# Altium PCB FIT_PM_Dual_Range_AFE.PcbDoc (part 16 of 17)
Units mm, origin at the board's own origin, x right, y up, seen from the top; angles counter-clockwise.
Board outline 259 x 114 mm, 8 copper layers (Top Layer, Mid-Layer 1, Mid-Layer 2, Layer 1, Layer 2, Mid-Layer 3, Mid-Layer 4, Bottom Layer), stack 1.616 mm thick; 963 components, 806 nets, 4757 pads, 2208 vias.
Unrouted connection lines stored in the file: 682.
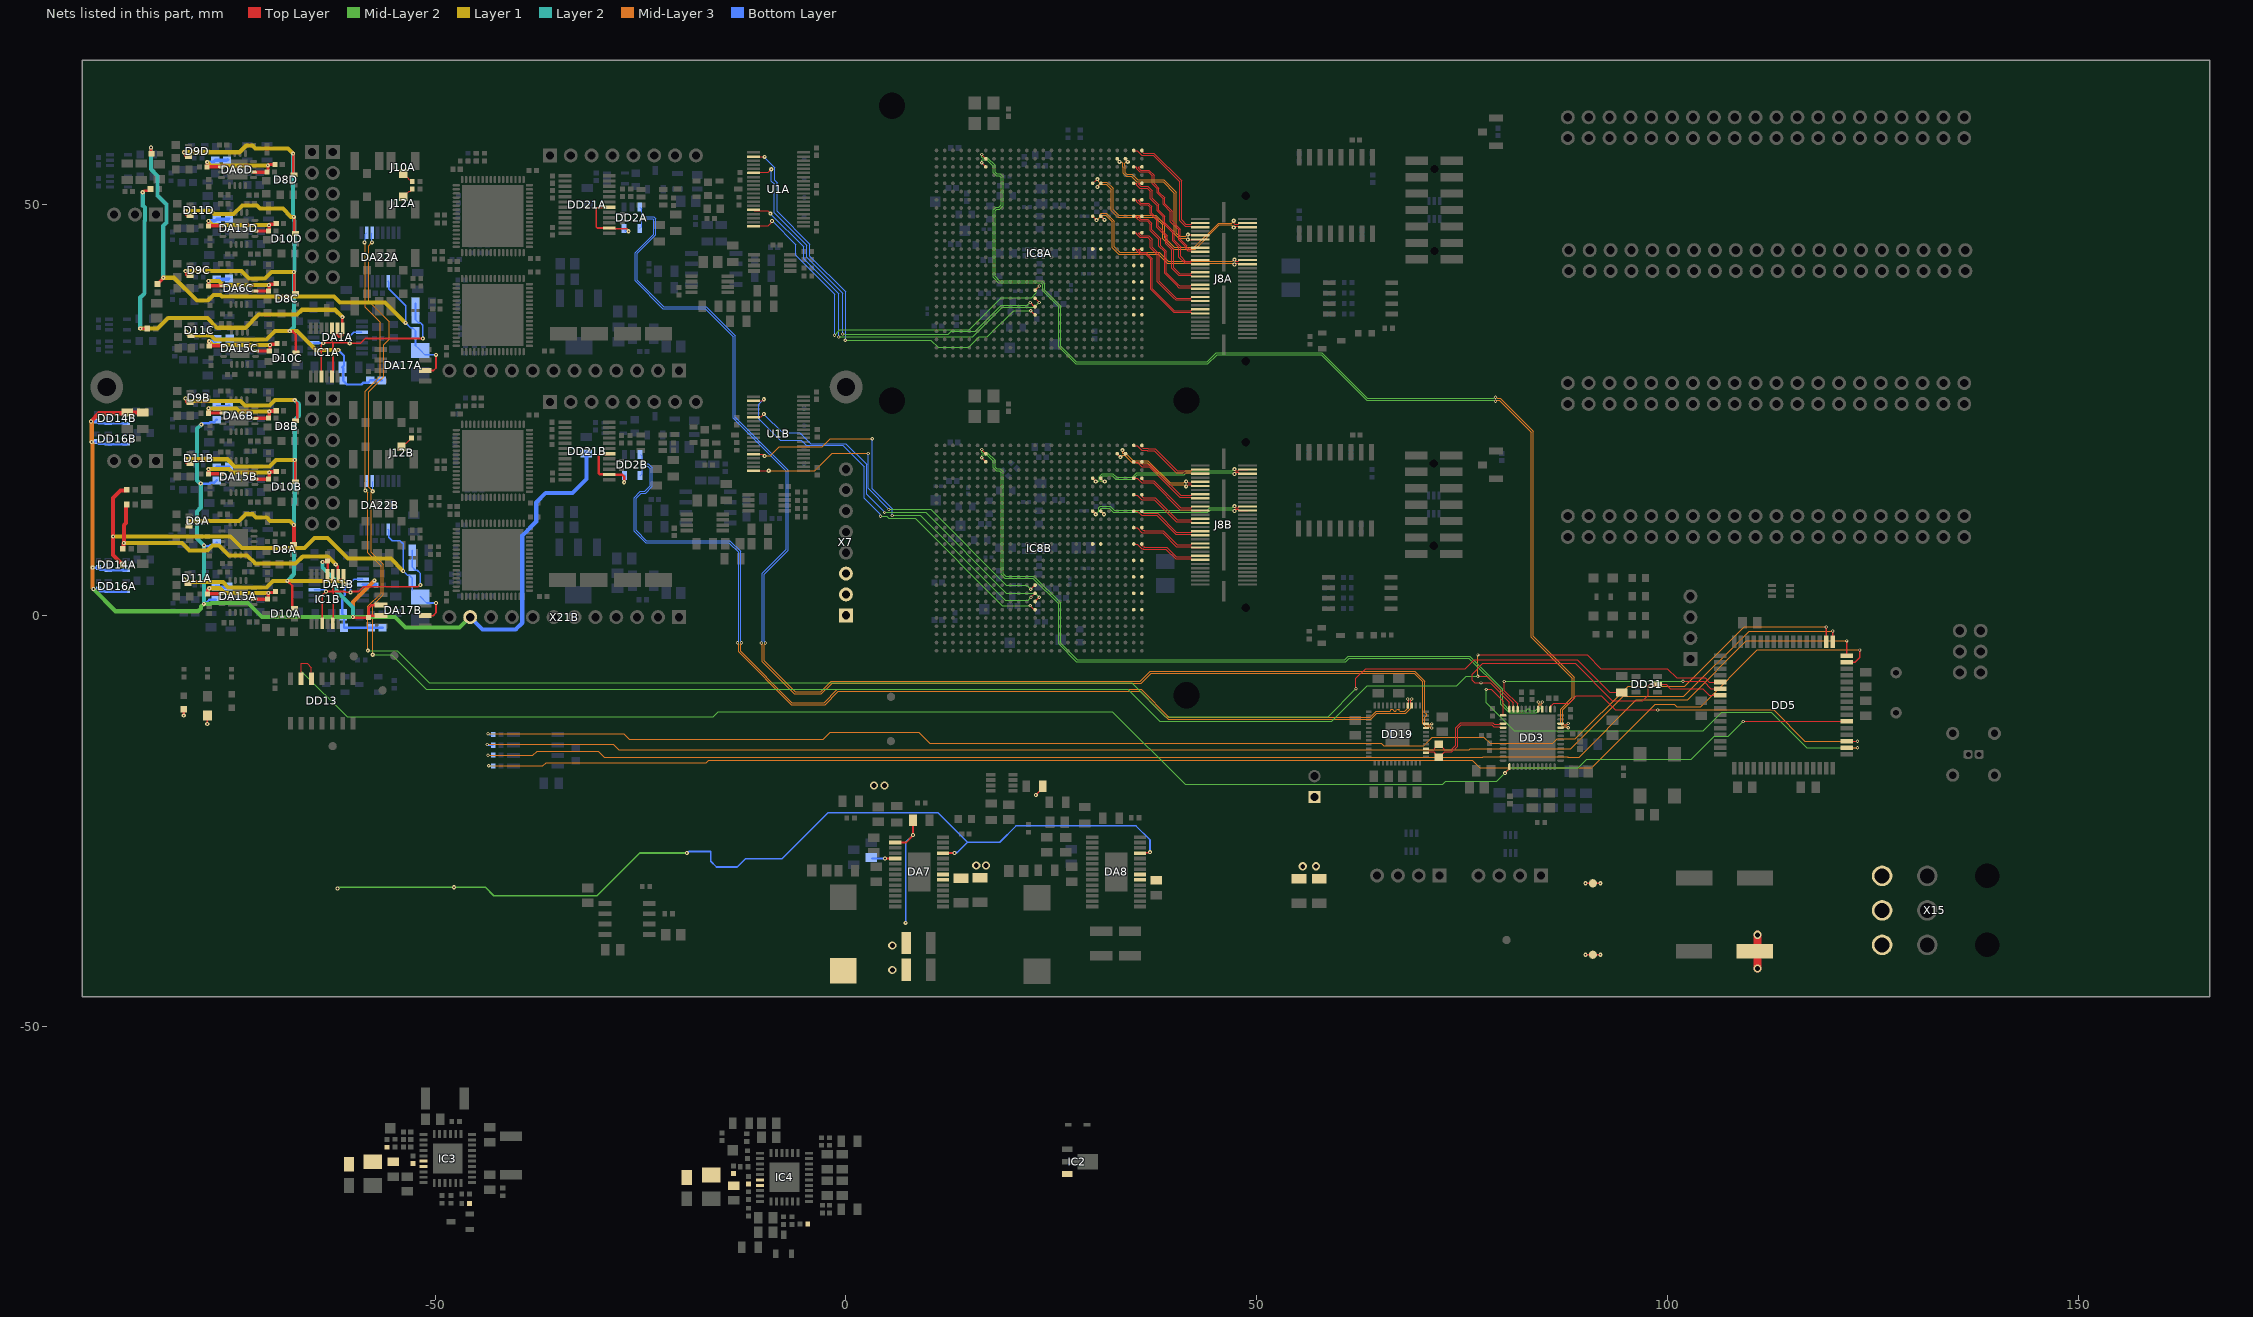
[diagram p18: the nets of this part, all layers, seen from the top]

## Via types
v1: diameter 0.5, hole 0.2, Top Layer to Bottom Layer, tented both sides, 1234 vias
v2: diameter 0.4, hole 0.2, Top Layer to Bottom Layer, tented both sides, 876 vias
v3: diameter 1, hole 0.6, Top Layer to Bottom Layer, tented both sides, 74 vias
v4: diameter 0.8, hole 0.4, Top Layer to Bottom Layer, tented both sides, 15 vias
v5: diameter 0.5, hole 0.2, Top Layer to Bottom Layer, 9 vias

## Nets (pads, with @x,y where several pads share a name; then routed paths per layer and width w, separated by ;. In a path a pad name is that pad's centre, name@x,y a point inside that pad or via, vN(x,y) a via of type N, cw(c..) or ccw(c..) an arc to the next point about the centre after c; other vN are vias at no path point) (continued)
P5V0_CFD1B: C89B.2 C126B.2 C288B.2 C305B.2 DA6B.6 DA6B.14 L25B.1 | length 16.2
  Top Layer w0.4: C89B.2@-77.6,24.6 v1(-77.6,25.2) ; C89B.2@-77.575,24.625 DA6B.6@-75.85,24.625 ; DA6B.14@-71.95,23.975 C288B.2@-70.325,23.975 ; C288B.2@-70.3,24 -70.19,24.11 v1@-70.19,24.603 ; v1(-70.2,24.8) -70.173,24.8 -70.073,24.9 C126B.2@-69.35,24.9 ; v1@-69.956,24.837 C126B.2@-69.413,24.837
  Layer 1 w0.5: v1(-77.6,25.2) -74.2,25.2 -73.8,24.8 v1(-70.2,24.8)
  Bottom Layer w0.4: v1(-77.6,25.2) -77.573,25.2 -77.548,25.225 -76.794,25.225 L25B.1@-76.6,25.419 -75.181,25.419 C305B.2@-75.1,25.5
P5V0_CFD1C: C89C.2 C126C.2 C288C.2 C305C.2 DA6C.6 DA6C.14 L25C.1 | length 15.9
  Top Layer w0.4: C288C.2@-77.6,40.1 v1(-77.6,40.7) ; C288C.2@-77.575,40.125 DA6C.6@-75.85,40.125 ; DA6C.14@-71.95,39.475 C89C.2@-70.325,39.475 ; C89C.2@-70.3,39.5 -70.214,39.586 -70.214,40.147 -70.247,40.18 v1(-70.247,40.207) -70.22,40.207 -70.137,40.29 -69.46,40.29 C126C.2@-69.35,40.4
  Layer 1 w0.5: v1(-77.6,40.7) -76.3,40.7 -75.807,40.207 v1(-70.247,40.207)
  Bottom Layer w0.4: v1(-77.6,40.7) -77.573,40.7 -77.548,40.725 -76.794,40.725 L25C.1@-76.6,40.919 -75.181,40.919 C305C.2@-75.1,41
P5V0_CFD1D: C89D.2 C126D.2 C288D.2 C305D.2 DA6D.6 DA6D.14 L25D.1 | length 15.7
  Top Layer w0.4: C89D.2@-77.768,54.568 v1(-77.768,55.168) ; C89D.2@-77.743,54.593 DA6D.6@-76.018,54.593 ; DA6D.14@-72.118,53.943 C288D.2@-70.493,53.943 ; C288D.2@-70.468,53.968 -70.358,54.078 v1@-70.358,54.571 ; v1(-70.368,54.768) -70.349,54.787 -70.322,54.787 -70.241,54.868 C126D.2@-69.518,54.868
  Layer 1 w0.5: v1(-77.768,55.168) -77.741,55.168 -77.341,54.768 v1(-70.368,54.768)
  Bottom Layer w0.4: v1(-77.768,55.168) -77.741,55.168 -77.716,55.193 -76.962,55.193 L25D.1@-76.768,55.387 C305D.2@-75.349,55.387 C305D.2@-75.268,55.468
P5V0_CFD2A: C92A.2 C129A.2 C286A.2 C309A.2 DA15A.6 DA15A.14 L29A.1 | length 15.6
  Top Layer w0.4: C92A.2@-77.7,2.6 -77.69,2.61 -77.69,3.11 v1(-77.5,3.3) ; C92A.2@-77.675,2.625 DA15A.6@-75.95,2.625 ; DA15A.14@-72.05,1.975 C286A.2@-70.425,1.975 ; C286A.2@-70.4,2 -70.314,2.086 -70.314,2.706 v1(-70.301,2.719) -70.274,2.719 -70.203,2.79 -69.56,2.79 C129A.2@-69.45,2.9
  Layer 1 w0.5: v1(-77.5,3.3) -76.219,3.3 -75.638,2.719 v1(-70.301,2.719)
  Bottom Layer w0.4: v1(-77.5,3.3) -77.481,3.319 -76.8,3.319 -76.7,3.419 -75.281,3.419 C309A.2@-75.2,3.5
P5V0_CFD2B: C92B.2 C129B.2 C286B.2 C309B.2 DA15B.6 DA15B.14 L29B.1 | length 16.2
  Top Layer w0.4: C286B.2@-77.6,17.2 v1(-77.6,17.8) ; C286B.2@-77.575,17.225 DA15B.6@-75.85,17.225 ; DA15B.14@-71.95,16.575 C92B.2@-70.325,16.575 ; C92B.2@-70.3,16.6 -70.19,16.71 v1@-70.19,17.203 ; v1(-70.2,17.4) -70.173,17.4 -70.073,17.5 C129B.2@-69.35,17.5 ; v1@-69.956,17.437 C129B.2@-69.413,17.437
  Layer 1 w0.5: v1(-77.6,17.8) -75.1,17.8 -74.7,17.4 v1(-70.2,17.4)
  Bottom Layer w0.4: v1(-77.6,17.8) -77.573,17.8 -77.548,17.825 -76.794,17.825 L29B.1@-76.6,18.019 -75.181,18.019 C309B.2@-75.1,18.1
P5V0_CFD2C: C92C.2 C129C.2 C286C.2 C309C.2 DA15C.6 DA15C.14 L29C.1 | length 15.9
  Top Layer w0.4: v1(-77.514,33.36) -77.514,32.814 C92C.2@-77.5,32.8 ; C92C.2@-77.475,32.825 DA15C.6@-75.75,32.825 ; DA15C.14@-71.85,32.175 C286C.2@-70.225,32.175 ; C286C.2@-70.2,32.2 -70.114,32.286 -70.114,32.903 v1(-70.102,32.915) -70.074,32.915 -69.999,32.99 -69.36,32.99 C129C.2@-69.25,33.1
  Layer 1 w0.5: v1(-77.514,33.36) -77.051,32.896 -70.12,32.896 v1(-70.102,32.915)
  Bottom Layer w0.4: v1(-77.514,33.36) -77.495,33.379 -76.74,33.379 L29C.1@-76.5,33.619 -75.081,33.619 C309C.2@-75,33.7
P5V0_CFD2D: C92D.2 C129D.2 C286D.2 C309D.2 DA15D.6 DA15D.14 L29D.1 | length 15.9
  Top Layer w0.4: C286D.2@-77.6,47.4 v1(-77.6,48) ; C286D.2@-77.575,47.425 DA15D.6@-75.85,47.425 ; DA15D.14@-71.95,46.775 C92D.2@-70.325,46.775 ; C92D.2@-70.3,46.8 -70.214,46.886 -70.214,47.478 v1(-70.228,47.493) -70.201,47.493 -70.104,47.59 -69.46,47.59 C129D.2@-69.35,47.7
  Layer 1 w0.5: v1(-77.6,48) -77.1,47.5 -70.235,47.5 v1(-70.228,47.493)
  Bottom Layer w0.4: v1(-77.6,48) -77.573,48 -77.548,48.025 -76.794,48.025 L29D.1@-76.6,48.219 -75.181,48.219 C309D.2@-75.1,48.3
P5V0_CFDA: C54A.2 C125C.2 C125D.2 C131A.2 C294C.2 C294D.2 C313A.2 DA1A.4 DA17A.2 DA17A.3 DD14C.1 DD14C.5 DD14D.1 DD14D.5 DD16C.1 DD16C.5 DD16D.1 DD16D.5 IC1A.4 L25C.2 L25D.2 L29C.2 L29D.2 R11C.2 R11D.2 R123A.1 X21A.11 | length 181.9
  Top Layer w0.3: v1(-63.8,36.7) C54A.2@-63.2,36.7 IC1A.4@-63.2,34.95
  Top Layer w0.5: v1(-91.8,54.8) -87.7,54.8 R11C.2@-87.5,55 R11D.2@-85.8,55 ; v1(-59.189,28.6) -59.189,28.789 -59.193,28.793 -59.193,29.207 -58.76,29.64 -58.16,29.64 C131A.2@-58.1,29.7 ; DA17A.3@-56.615,29.801 -57.09,29.801 -57.191,29.7 C131A.2@-58.1,29.7 ; DA17A.2@-56.615,31.071 -57.807,31.071 -58.1,30.778 C131A.2@-58.1,29.7
  Mid-Layer 2 w0.5: v1(-91.7,32.3) -89.349,32.3 -88.599,31.55 v1(-77.96,31.55) -77.181,31.55 -77.031,31.7 -72.764,31.7 -69.664,28.6 -63.931,28.6 -63.831,28.7 -63.169,28.7 -63.069,28.6 v1(-59.189,28.6) -59.169,28.58 -46.94,28.58 X21A.11@-45.74,29.78
  Mid-Layer 3 w0.5: v1(-91.8,54.8) v1(-91.8,52.3) -91.599,52.099 v1(-91.599,34.698) -91.7,34.597 v1(-91.7,32.3) ; v1(-59.189,28.6) -59.189,32.571 v1(-57.5,34.26)
  Layer 1 w0.5: v1(-63.8,36.7) -63.1,36 -62.2,36 -60.8,34.6 -59.6,34.6 -59.26,34.26 v1(-57.5,34.26)
  Layer 2 w0.5: v1(-78.559,53.301) -79.1,52.759 -79.1,46.641 -78.72,46.262 v1(-78.611,46.262) -78.611,42.788 -78.686,42.713 -78.686,39.239 -78.359,38.912 v1(-78.256,38.912) -78.256,34.244 -79.2,33.3 -79.2,32.055 -78.711,31.566 -77.976,31.566 v1(-77.96,31.55)
  Bottom Layer w0.3: v1(-91.8,52.3) -91.75,52.25 C125D.2@-91,52.25 -90.9,52.15 DD16D.1@-89.6,52.15 DD16D.5@-87.4,52.15 ; v1(-91.8,54.8) -91.7,54.8 -91.65,54.85 C294D.2@-91,54.85 -90.9,54.75 DD14D.1@-89.6,54.75 DD14D.5@-87.4,54.75 ; v1(-91.7,32.3) -91.65,32.35 C125C.2@-91,32.35 -90.7,32.05 DD16C.1@-89.7,32.05 DD16C.5@-87.5,32.05 ; v1(-91.599,34.698) -91.544,34.698 -91.353,34.89 -91.16,34.89 C294C.2@-91,35.05 -90.7,34.75 DD14C.1@-89.7,34.75 DD14C.5@-87.5,34.75 ; v1(-78.611,46.262) -78.556,46.262 -78.495,46.2 -77.493,46.2 -77.399,46.294 -76.925,46.294 L29D.2@-76.6,46.619 ; v1(-78.559,53.301) -77.724,53.301 -77.562,53.462 -77.093,53.462 L25D.2@-76.768,53.787 ; v1(-78.256,38.912) -78.244,38.9 -77.286,38.9 -77.192,38.994 -76.925,38.994 L25C.2@-76.6,39.319 ; v1(-77.96,31.55) -77.922,31.588 -77.812,31.588 -77.381,32.019 L29C.2@-76.5,32.019 ; DA1A.4@-58.919,33.824 -57.524,33.824 C313A.2@-57.4,33.7 -57.528,33.828 -57.528,34.232 v1(-57.5,34.26)
  Bottom Layer w0.5: X21A.11@-45.74,29.78 -44.26,28.3 -40.1,28.3 -39.389,29.011 -39.389,30.511 -38.662,31.238 -38.662,41.981 -33.9,46.743 -33.9,46.76 -31.592,49.068 -31.592,49.908 R123A.1@-31.5,50
P5V0_CFDA: C54B.2 C125A.2 C125B.2 C131B.2 C294A.2 C294B.2 C313B.2 DA1B.4 DA17B.2 DA17B.3 DD14A.1 DD14A.5 DD14B.1 DD14B.5 DD16A.1 DD16A.5 DD16B.1 DD16B.5 IC1B.4 L25A.2 L25B.2 L29A.2 L29B.2 R11A.2 R11B.2 R123B.1 X21B.11 | length 181.9
  Top Layer w0.3: v1(-63.7,6.5) -63.2,6.5 C54B.2@-63.1,6.6 -63.104,6.596 IC1B.4@-63.104,4.937 ; v1(-60.025,-0.2) -59.987,-0.238 -59.762,-0.238 -59.7,-0.3 -58.15,-0.3 C131B.2@-58.1,-0.25 ; DA17B.3@-56.6,-0.035 -57.885,-0.035 C131B.2@-58.1,-0.25 ; DA17B.2@-56.6,1.235 -57.765,1.235 -58.1,0.9 C131B.2@-58.1,-0.25
  Top Layer w0.5: v1(-91.9,23.6) -90.9,24.6 -87.6,24.6 R11B.2@-87.5,24.7 R11A.2@-85.6,24.7
  Mid-Layer 2 w0.5: v1(-91.6,3.2) -88.9,0.5 -78.851,0.5 -78.5,0.851 -78.5,1.06 v1(-78.16,1.4) -77.356,1.4 -77.256,1.5 -72.8,1.5 -71.1,-0.2 v1(-60.025,-0.2) -54.9,-0.2 -53.6,-1.5 -47.02,-1.5 X21B.11@-45.74,-0.22
  Mid-Layer 3 w0.5: v1(-91.9,23.6) -91.8,23.5 v1(-91.8,21.1) -91.7,21 v1(-91.7,5.8) -91.7,3.3 v1(-91.6,3.2) ; v1(-60.025,-0.2) -60.025,1.635 v1(-57.4,4.26)
  Layer 2 w0.5: v1(-78.466,23.229) -78.971,22.724 -78.971,16.391 -78.62,16.04 v1(-78.541,16.04) -78.541,13.096 -79,12.637 -79,9.369 v1(-78.144,8.514) -78.144,5.81 -78.16,5.795 v1(-78.16,1.4) ; v1(-63.7,6.5) -63.7,5.8 -62,4.1 -62,2.938 -60.025,0.962 v1(-60.025,-0.2)
  Bottom Layer w0.3: v1(-91.9,23.6) -91.25,23.6 C125B.2@-91.2,23.65 -90.95,23.4 -89.85,23.4 DD14B.1@-89.8,23.35 DD14B.5@-87.6,23.35 ; v1(-91.8,21.1) -91.25,21.1 C294B.2@-91.2,21.15 -90.95,20.9 -89.85,20.9 DD16B.1@-89.8,20.85 DD16B.5@-87.6,20.85 ; v1(-91.7,5.8) C125A.2@-91,5.8 -90.75,5.55 -89.85,5.55 DD14A.1@-89.8,5.5 DD14A.5@-87.6,5.5 ; v1(-91.6,3.2) C294A.2@-91,3.2 -90.84,3.04 -90.84,2.966 -90.824,2.95 -89.85,2.95 DD16A.1@-89.8,2.9 DD16A.5@-87.6,2.9 ; v1(-78.541,16.04) -77.947,16.04 -77.907,16 -77.493,16 -77.343,16.15 -76.869,16.15 L29B.2@-76.6,16.419 ; v1(-78.466,23.229) -78.412,23.229 -78.241,23.4 -77.493,23.4 -77.399,23.494 -76.925,23.494 L25B.2@-76.6,23.819 ; v1(-78.16,1.4) -78.122,1.438 -77.962,1.438 -77.5,1.9 L29A.2@-76.7,1.9 ; v1(-78.144,8.514) -78.09,8.514 -78.016,8.44 -77.455,8.44 -77.342,8.552 -76.865,8.552 L25A.2@-76.598,8.819 ; DA1B.4@-58.813,3.756 -58.757,3.7 C313B.2@-57.2,3.7 -57.36,3.86 -57.36,4.06 -57.362,4.062 -57.362,4.222 v1(-57.4,4.26)
  Bottom Layer w0.5: X21B.11@-45.74,-0.22 -44.26,-1.7 -40.2,-1.7 -39.4,-0.9 -39.4,9.7 -37.7,11.4 -37.7,13.749 -36.549,14.9 -33.3,14.9 -31.6,16.6 R123B.1@-31.6,19.7
P5V5: C114.2 C115.2 DA7.16 L9.2 R60.2 X7.1 X7.2 X7.3 | length 15.3
  Top Layer w0.2: DA7.16@6.154,-27.649 7.32,-27.649 8.015,-26.954 8.015,-26.943 8.176,-26.782 v1@8.187,-26.782 ; v1(8.154,-26.729) R60.2@8.154,-24.869
  Bottom Layer w0.2: v1(7.254,-37.429) 7.254,-27.628 v1(8.154,-26.729)
  other v3: 5.637,-43.175 5.637,-40.175 3.403,-20.724 4.703,-20.724
P5V5_P3V8_P1V8_N5V5_PG: DA7.11 DA8.11 | length 115.3
  Top Layer w0.2: DA7.11@11.804,-28.949 11.817,-28.936 13.19,-28.936 v1(13.203,-28.924) ; DA8.11@35.644,-28.949 35.713,-28.879 36.951,-28.879 v1(37.005,-28.826)
  Mid-Layer 2 w0.2: v1(-61.891,-33.241) -61.815,-33.241 -61.665,-33.091 v1(-47.704,-33.091) -43.889,-33.091 -42.855,-34.124 -30.297,-34.124 -25.103,-28.93 v1(-19.371,-28.93)
  Bottom Layer w0.15: v1(-47.704,-33.091) v1@-47.679,-33.116
  Bottom Layer w0.2: v1(-19.371,-28.93) -19.295,-28.93 -19.106,-28.741 -16.454,-28.741 ; -16.454,-28.772 -16.454,-29.928 -15.756,-30.625 -13.225,-30.625 -12.224,-29.624 -7.797,-29.624 -2.19,-24.017 11.195,-24.017 14.803,-27.624 ; v1(13.203,-28.924) 13.26,-28.867 13.56,-28.867 14.803,-27.624 ; v1(37.005,-28.826) 37.005,-27.326 35.31,-25.632 20.695,-25.632 18.703,-27.624 14.803,-27.624
P12V0_IN: C13.1 C14.1 C19.2 C20.2 C45.1 C47.1 C48.2 C49.2 C192.1 IC2.3 IC3.28 IC3.29 IC4.28 IC4.29 LD4.2 R16.1 R47.2 R78.1 R89.2 R110.2 X15.4 X15.5 X15.6 | length 6.4
  Top Layer w0.2: v1(23.111,-21.871) 23.114,-21.871 23.951,-21.035 R110.2@23.951,-20.81 ; v3@110.883,-38.829 v3(110.939,-38.886)
  Top Layer w0.3: v1(-80.606,-12.212) LD4.2@-80.606,-11.439
  Top Layer w1: v3(110.939,-42.986) v3(110.939,-38.886)
PLL_CLK0_N: DD3.28 DD19.2 R127.1 | length 12.9
  Top Layer w0.145: DD19.2@70.599,-16.714 70.799,-16.714 70.927,-16.587 71.536,-16.587 71.73,-16.781 71.73,-16.914 72.107,-17.292 R127.1@72.157,-17.292 72.207,-17.292 72.585,-16.914 72.585,-16.912 72.883,-16.614 73.766,-16.614 74.464,-15.916 74.464,-13.769 74.919,-13.314 78.619,-13.314 78.836,-13.531 79.562,-13.531 79.702,-13.671 DD3.28@79.999,-13.671
PLL_CLK0_N1: DD2A.4 DD19.8 | length 160.2
  Top Layer w0.145: DD19.8@70.599,-13.714 70.799,-13.714 70.927,-13.587 71.121,-13.587 71.249,-13.714 v2(71.318,-13.714)
  Mid-Layer 3 w0.1: v2(-10.308,-3.371) -10.308,-3.45 -10.178,-3.58 -10.178,-5.656 -6.28,-9.554 -2.981,-9.554 -1.671,-8.244 35.929,-8.244 37.133,-7.04 69.145,-7.04 70.215,-8.11 70.215,-13.21 70.589,-13.584 70.868,-13.584 71.109,-13.584 71.239,-13.714 v2(71.318,-13.714)
  Bottom Layer w0.145: DD2A.4@-25.1,47.1 -24.873,47.327 -24.873,48.193 -24.788,48.278 -23.5,48.278 -23.4,48.178 -23.4,46.4 -25.645,44.155 -25.645,40.699 -22.283,37.337 -17.139,37.337 -13.713,33.911 -13.713,24.016 -7.245,17.548 -7.245,8.055 -10.181,5.119 -10.181,-3.175 -10.308,-3.302 v2(-10.308,-3.371)
PLL_CLK0_N2: DD2B.4 DD19.15 | length 126.3
  Top Layer w0.145: DD19.15@68.869,-10.984 68.869,-10.784 68.742,-10.657 68.742,-10.383 68.869,-10.256 v2(68.869,-10.187)
  Mid-Layer 3 w0.1: v2(-13.208,-3.338) -13.208,-3.416 -13.078,-3.546 -13.078,-4.456 -6.68,-10.854 -2.553,-10.854 -0.953,-9.254 35.82,-9.254 39.208,-12.643 63.891,-12.643 64.619,-11.914 68.129,-11.914 68.739,-11.304 68.739,-10.395 68.869,-10.265 v2(68.869,-10.187)
  Bottom Layer w0.145: DD2B.4@-25.05,17 -24.823,17.227 -24.823,18.055 -24.7,18.177 -24.139,18.177 -23.8,17.839 -23.8,15.8 -24.5,15.1 -25.022,15.1 -25.789,14.333 -25.789,10.253 -24.391,8.855 -14.255,8.855 -13.081,7.681 -13.081,-3.141 -13.208,-3.269 v2(-13.208,-3.338)
PLL_CLK0_OUTA: DD2A.5 DD21A.2 DD21A.6 | length 8.9
  Top Layer w0.2: DD21A.6@-28.8,49.682 -28.883,49.6 -30.283,49.6 -30.4,49.483 -30.4,47.26 -30.283,47.142 DD21A.2@-28.8,47.142 -28.7,47.042 -26.642,47.042 -26.642,47.032 -26.45,46.84 v1(-26.45,46.759)
  Bottom Layer w0.2: DD2A.5@-27,47.1 -27,46.959 -26.8,46.759 v1(-26.45,46.759)
PLL_CLK0_OUTB: DD2B.5 DD21B.2 DD21B.6 | length 8.3
  Top Layer w0.3: DD21B.6@-28.8,19.683 -28.85,19.633 -29.924,19.633 -30.1,19.457 -30.1,17.318 -29.974,17.193 -28.85,17.193 DD21B.2@-28.8,17.143 -28.757,17.1 -27.2,17.1 -27,16.9 v1(-27,16.2)
  Bottom Layer w0.3: v1(-27,16.2) -26.975,16.225 -26.975,16.975 DD2B.5@-26.95,17
PLL_CLK0_P: DD3.27 DD19.3 R127.2 | length 12.8
  Top Layer w0.145: DD19.3@70.599,-16.214 70.799,-16.214 70.927,-16.342 71.515,-16.342 71.73,-16.127 71.73,-16.069 72.107,-15.692 R127.2@72.157,-15.692 72.207,-15.692 72.885,-16.369 72.891,-16.369 73.664,-16.369 74.219,-15.814 74.219,-13.668 74.818,-13.069 78.721,-13.069 78.937,-13.286 79.567,-13.286 79.682,-13.171 DD3.27@79.999,-13.171
PLL_CLK0_P1: DD2A.3 DD19.9 | length 160.4
  Top Layer w0.145: DD19.9@70.599,-13.214 70.799,-13.214 70.927,-13.342 71.121,-13.342 71.249,-13.214 v2(71.318,-13.214)
  Mid-Layer 3 w0.1: v2(-9.808,-3.371) -9.808,-3.45 -9.938,-3.58 -9.938,-5.557 -6.181,-9.314 -3.081,-9.314 -1.771,-8.004 35.829,-8.004 37.033,-6.8 69.244,-6.8 70.455,-8.011 70.455,-11.248 70.455,-11.858 70.544,-11.947 70.594,-11.947 70.683,-12.035 70.683,-12.212 70.594,-12.301 70.544,-12.301 70.455,-12.389 70.455,-12.793 70.455,-13.111 70.689,-13.344 70.968,-13.344 71.109,-13.344 71.239,-13.214 v2(71.318,-13.214)
  Bottom Layer w0.145: DD2A.3@-25.1,49.7 -24.873,49.473 -24.873,48.607 -24.788,48.523 -23.399,48.523 -23.155,48.279 -23.155,46.299 -25.4,44.054 -25.4,40.8 -22.181,37.582 -17.037,37.582 -13.468,34.012 -13.468,24.118 -7,17.65 -7,7.954 -9.936,5.018 -9.936,-3.175 -9.808,-3.302 v2(-9.808,-3.371)
PLL_CLK0_P2: DD2B.3 DD19.16 | length 126.5
  Top Layer w0.145: DD19.16@68.369,-10.984 68.369,-10.784 68.497,-10.657 68.497,-10.383 68.369,-10.256 v2(68.369,-10.187)
  Mid-Layer 3 w0.1: v2(-12.708,-3.338) -12.708,-3.416 -12.838,-3.546 -12.838,-4.357 -6.581,-10.614 -2.652,-10.614 -1.052,-9.014 35.919,-9.014 39.307,-12.403 63.791,-12.403 64.52,-11.674 65.677,-11.674 66.209,-11.674 66.297,-11.586 66.297,-11.509 66.386,-11.42 66.563,-11.42 66.651,-11.509 66.651,-11.586 66.74,-11.674 66.917,-11.674 67.005,-11.586 67.005,-11.509 67.094,-11.42 67.271,-11.42 67.359,-11.509 67.359,-11.586 67.448,-11.674 67.852,-11.674 68.029,-11.674 68.499,-11.204 68.499,-10.395 68.369,-10.265 v2(68.369,-10.187)
  Bottom Layer w0.145: DD2B.3@-25.05,19.6 -24.823,19.373 -24.823,18.545 -24.7,18.422 -24.037,18.422 -23.555,17.94 -23.555,15.699 -24.399,14.855 -24.921,14.855 -25.544,14.232 -25.544,10.354 -24.29,9.1 -14.154,9.1 -12.836,7.782 -12.836,-3.141 -12.708,-3.269 v2(-12.708,-3.338)
PLL_CLK_N1: DD3.10 IC8A.AE20 | length 135.6
  Top Layer w0.145: v2(16.519,56.086) IC8A.AE20@17.019,55.586 ; DD3.10@86.999,-13.171 87.309,-13.171 87.436,-13.298 87.723,-13.298 87.85,-13.171 v2(87.919,-13.171)
  Mid-Layer 2 w0.1: v2(16.519,56.086) 16.519,55.764 16.578,55.706 17.223,55.706 18.159,54.77 18.159,53.951 18.374,53.736 18.769,53.736 19.144,53.361 19.144,49.876 18.704,49.436 18.335,49.436 18.141,49.242 18.141,41.258 18.663,40.736 23.819,40.736 24.169,40.386 24.169,39.594 26.126,37.637 26.126,32.778 28.044,30.86 43.96,30.86 45.076,31.976 57.93,31.976 63.464,26.442 78.859,26.442 78.978,26.561 v2(79.059,26.561)
  Mid-Layer 3 w0.1: v2(79.059,26.561) 79.138,26.561 79.268,26.431 79.62,26.431 83.659,22.392 83.659,-2.554 88.644,-7.539 88.644,-10.089 87.219,-11.514 87.219,-13.147 87.373,-13.301 87.711,-13.301 87.841,-13.171 v2(87.919,-13.171)
PLL_CLK_N2: DD3.17 IC8B.AE20 | length 96
  Top Layer w0.145: v2(16.519,20.186) IC8B.AE20@17.019,19.686 ; DD3.17@84.249,-11.421 84.249,-11.111 84.376,-10.983 84.376,-10.739 84.249,-10.611 v2(84.249,-10.542)
  Mid-Layer 2 w0.1: v2(16.519,20.186) 16.519,19.864 16.578,19.806 17.223,19.806 18.159,18.87 18.159,18.051 18.374,17.836 18.769,17.836 19.124,17.481 19.124,5.076 19.424,4.776 22.862,4.776 26.119,1.519 26.119,-3.375 28.144,-5.4 60.705,-5.4 61.148,-4.958 75.902,-4.958 79.919,-8.975 79.919,-10.714 80.819,-11.614 82.438,-11.614 82.8,-11.614 82.889,-11.526 82.889,-11.475 82.977,-11.387 83.154,-11.387 83.243,-11.475 83.243,-11.526 83.331,-11.614 83.735,-11.614 83.919,-11.614 84.379,-11.154 84.379,-10.751 84.249,-10.621 v2(84.249,-10.542)
PLL_CLK_P1: DD3.9 IC8A.AD20 | length 135.6
  Top Layer w0.145: v2(16.519,55.086) IC8A.AD20@17.019,54.586 ; DD3.9@86.999,-13.671 87.309,-13.671 87.436,-13.543 87.723,-13.543 87.85,-13.671 v2(87.919,-13.671)
  Mid-Layer 2 w0.1: v2(16.519,55.086) 16.519,55.407 16.578,55.466 17.123,55.466 17.919,54.67 17.919,53.851 18.275,53.496 18.67,53.496 18.904,53.262 18.904,49.975 18.604,49.676 18.235,49.676 17.901,49.341 17.901,41.159 18.563,40.496 23.72,40.496 23.929,40.287 23.929,39.494 25.886,37.537 25.886,32.678 27.945,30.62 44.059,30.62 45.175,31.736 57.83,31.736 63.364,26.202 78.851,26.202 78.992,26.061 v2(79.059,26.061)
  Mid-Layer 3 w0.1: v2(79.059,26.061) 79.138,26.061 79.268,26.191 79.521,26.191 83.419,22.293 83.419,-2.654 88.404,-7.639 88.404,-9.99 86.979,-11.415 86.979,-13.247 87.273,-13.541 87.711,-13.541 87.841,-13.671 v2(87.919,-13.671)
PLL_CLK_P2: DD3.16 IC8B.AD20 | length 96.2
  Top Layer w0.145: v2(16.519,19.186) IC8B.AD20@17.019,18.686 ; DD3.16@84.749,-11.421 84.749,-11.111 84.621,-10.983 84.621,-10.739 84.749,-10.611 v2(84.749,-10.542)
  Mid-Layer 2 w0.1: v2(16.519,19.186) 16.519,19.507 16.578,19.566 17.123,19.566 17.919,18.77 17.919,17.951 18.275,17.596 18.67,17.596 18.884,17.381 18.884,4.976 19.325,4.536 22.762,4.536 25.879,1.419 25.879,-3.474 28.045,-5.64 60.805,-5.64 61.247,-5.198 75.803,-5.198 79.679,-9.074 79.679,-10.814 80.72,-11.854 84.019,-11.854 84.619,-11.254 84.619,-10.751 84.749,-10.621 v2(84.749,-10.542)
PLL_LOCK: DD3.37 DD5.54 DD13.12 DD13.13 | length 203.2
  Top Layer w0.1: DD13.13@-66.337,-7.724 -66.288,-7.675 -66.288,-5.851 -65.57,-5.851 -65.067,-6.354 DD13.12@-65.067,-7.724 ; v1(80.217,-19.205) 80.229,-19.205 80.749,-18.684 DD3.37@80.749,-18.421 ; v2(109.219,-12.914) DD5.54@121.819,-12.914
  Mid-Layer 2 w0.1: -66.288,-6.807 -60.726,-12.369 -16.164,-12.369 -15.522,-11.727 32.427,-11.727 41.288,-20.588 72.645,-20.588 73.019,-20.214 79.207,-20.214 v1(80.217,-19.205) 80.862,-18.559 89.127,-18.559 90.172,-17.514 102.89,-17.514 105.69,-14.714 107.419,-14.714 v2(109.219,-12.914)
PLL_SPI_CLK: DD3.24 DD5.23 DD31.2 | length 41.9
  Top Layer w0.15: DD3.24@80.749,-11.421 80.749,-10.571 78.402,-8.225 v2(77.289,-8.225) 77.278,-8.214 76.519,-8.214 76.219,-7.914 76.219,-7.161 77.528,-5.852 88.757,-5.852 93.288,-10.383 96.996,-10.383 97.676,-9.703 97.676,-8.557 97.819,-8.414 DD31.2@98.769,-8.414 99.819,-8.414 100.319,-8.914 104.305,-8.914 105.105,-9.714 DD5.23@106.419,-9.714
PLL_SPI_LE: DD3.25 DD5.50 | length 56.6
  Top Layer w0.1: v2(77.919,-9.014) 78.545,-9.014 79.999,-10.468 DD3.25@79.999,-12.171 ; DD5.50@121.819,-16.114 v2(123.119,-16.114)
  Mid-Layer 2 w0.1: v2(77.919,-9.014) 77.919,-10.614 81.366,-14.061 104.373,-14.061 106.619,-11.814 112.619,-11.814 116.919,-16.114 v2(123.119,-16.114)
PLL_SPI_MISO: DD3.22 DD5.22 | length 30.7
  Top Layer w0.1: v2(80.133,-8.049) 80.133,-9.172 81.749,-10.788 DD3.22@81.749,-11.421
  Top Layer w0.15: v2(101.88,-8.039) 104.381,-8.039 105.256,-8.914 DD5.22@106.419,-8.914
  Mid-Layer 2 w0.1: v2(80.133,-8.049) 80.138,-8.044 101.875,-8.044 v2(101.88,-8.039)
PLL_SPI_MOSI: DA22A.11 DA22B.11 DD3.23 DD5.21 | length 236.4
  Top Layer w0.1: v2(76.919,-7.403) 78.008,-7.403 81.249,-10.644 DD3.23@81.249,-11.421
  Top Layer w0.15: v2(76.919,-4.814) 90.219,-4.814 91.892,-6.487 99.992,-6.487 101.119,-7.614 104.584,-7.614 105.084,-8.114 DD5.21@106.419,-8.114
  Mid-Layer 2 w0.1: v1(-57.6,-4.8) -55.3,-4.8 -51.086,-9.014 34.319,-9.014 38.219,-12.914 59.119,-12.914 63.436,-8.597 74.336,-8.597 75.53,-7.403 v2(76.919,-7.403)
  Mid-Layer 3 w0.1: v1(-57.7,45.4) -58.1,45 -58.1,38.231 -55.6,35.731 -55.6,33.6 -56.27,32.93 -56.27,29.055 -58.1,27.226 -58.1,15.6 v1@-57.609,15.109 ; v1(-57.6,-4.8) -57.6,1.2 -56.3,2.5 -56.3,6.2 -57.8,7.7 -57.8,15 -57.691,15.109 v1@-57.609,15.109 ; v1(-57.6,15.1) v1@-57.609,15.109
  Mid-Layer 3 w0.15: v2(76.919,-7.403) v2(76.919,-4.814)
  Bottom Layer w0.1: v1(-57.7,45.4) -57.7,46.525 DA22A.11@-57.675,46.55 ; DA22B.11@-57.675,16.35 -57.6,16.275 v1(-57.6,15.1)
PLL_SYNC: DD3.14 DD5.51 | length 41.8
  Top Layer w0.1: DD3.14@85.749,-11.421 85.749,-11.146 86.174,-10.721 88.012,-10.721 88.919,-9.814 91.92,-9.814 93.62,-11.514 v2(98.819,-11.514) ; DD5.51@121.819,-15.314 v2(123.119,-15.314)
  Mid-Layer 3 w0.1: v2(98.819,-11.514) 112.903,-11.514 116.703,-15.314 v2(123.119,-15.314)
Q224_REFCLK0A_N: IC8A.AB6 J8A.6 | length 26.4
  Top Layer w0.127: v1(30.594,52.133) 30.594,52.18 30.843,52.429 30.862,52.429 IC8A.AB6@31.019,52.586
  Top Layer w0.145: v1(47.2,47.2) 47.2,47.278 47.3,47.378 47.742,47.378 47.87,47.25 J8A.6@48.865,47.25
  Mid-Layer 3 w0.1: v1(30.594,52.133) 30.594,52.242 30.787,52.434 30.787,52.438 30.846,52.497 31.028,52.497 31.668,52.497 32.3,51.865 32.3,49.256 33.092,48.465 37.596,48.465 38.547,47.514 38.547,45.864 39.85,44.56 42.499,44.56 45.453,47.514 46.886,47.514 v1(47.2,47.2)
Q224_REFCLK0A_P: IC8A.AB7 J8A.4 | length 26.8
  Top Layer w0.127: IC8A.AB7@30.019,52.586 30.066,52.586 30.58,53.1 v1(30.6,53.1)
  Top Layer w0.145: v1(47.2,48.027) 47.233,47.994 47.233,47.689 47.3,47.623 47.742,47.623 47.87,47.75 J8A.4@48.865,47.75
  Mid-Layer 3 w0.1: v1(30.6,53.1) 30.6,52.992 30.787,52.805 30.787,52.795 30.846,52.737 30.929,52.737 31.768,52.737 32.54,51.964 32.54,49.356 33.191,48.705 37.695,48.705 38.787,47.613 38.787,45.963 39.95,44.8 42.4,44.8 45.354,47.754 46.927,47.754 v1(47.2,48.027)
Q224_REFCLK0B_N: IC8B.AB6 J8B.6 | length 20.7
  Top Layer w0.1: v1(47.3,17.2) 47.3,17.3 47.4,17.4 47.497,17.4 47.721,17.4 47.78,17.341 47.78,17.34 47.87,17.25 J8B.6@48.865,17.25
  Top Layer w0.127: IC8B.AB6@31.019,16.686 31.405,16.3 v1(31.5,16.3)
  Mid-Layer 2 w0.1: v1(31.5,16.3) 31.129,16.3 31.07,16.359 31.07,16.8 31.27,17 32.393,17 32.834,16.559 34.923,16.559 35.474,17.11 41.182,17.11 41.451,17.38 47.041,17.38 47.221,17.2 v1(47.3,17.2)
  Mid-Layer 3 w0.1: 31.018,16.3 v1(31.5,16.3)
Q224_REFCLK0B_P: IC8B.AB7 J8B.4 | length 20.9
  Top Layer w0.1: IC8B.AB7@30.019,16.686 30.019,16.683 30.4,16.302 v1(30.4,16.3) ; v1(47.3,17.8) 47.3,17.7 47.4,17.6 47.58,17.6 47.721,17.6 47.78,17.659 47.78,17.661 47.87,17.75 J8B.4@48.865,17.75
  Mid-Layer 2 w0.1: v1(30.4,16.3) 30.771,16.3 30.83,16.359 30.83,16.899 31.171,17.24 32.493,17.24 32.934,16.799 34.823,16.799 35.374,17.35 41.082,17.35 41.352,17.62 47.041,17.62 47.221,17.8 v1(47.3,17.8)
  Mid-Layer 3 w0.1: v1(30.4,16.3) 30.778,16.3
Q224_RX0A_N: IC8A.AF1 J8A.3 | length 13.7
  Top Layer w0.145: IC8A.AF1@36.019,56.586 36.019,56.503 36.126,56.397 36.126,56.357 36.211,56.272 37.473,56.272 40.856,52.889 40.856,48.154 41.388,47.623 42.012,47.623 42.139,47.75 J8A.3@43.135,47.75
Q224_RX0A_P: IC8A.AF2 J8A.5 | length 14.8
  Top Layer w0.145: IC8A.AF2@35.019,56.586 35.03,56.575 35.462,56.575 36.01,56.027 37.372,56.027 40.611,52.787 40.611,48.052 41.286,47.378 42.012,47.378 42.139,47.25 J8A.5@43.135,47.25
Q224_RX0B_N: IC8B.AF1 J8B.3 | length 8.6
  Top Layer w0.145: IC8B.AF1@36.019,20.686 36.078,20.627 36.078,20.418 36.167,20.328 36.745,20.328 36.773,20.3 37.646,20.3 40.324,17.623 42.012,17.623 42.139,17.75 J8B.3@43.135,17.75
Q224_RX0B_P: IC8B.AF2 J8B.5 | length 9.5
  Top Layer w0.145: IC8B.AF2@35.019,20.686 35.062,20.643 35.45,20.643 36.009,20.083 36.643,20.083 36.672,20.055 37.545,20.055 40.223,17.378 42.012,17.378 42.139,17.25 J8B.5@43.135,17.25
Q224_RX1A_N: IC8A.AE3 J8A.9 | length 17.5
  Top Layer w0.1: IC8A.AE3@34.019,55.586 34.019,55.533 34.3,55.252 v1(34.3,55.2)
  Top Layer w0.145: v1(41.609,46.344) 41.656,46.297 43.088,46.297 J8A.9@43.135,46.25
  Mid-Layer 3 w0.1: v1(34.3,55.2) 34.223,55.123 34.043,55.123 33.92,55 33.92,54.668 34.016,54.572 34.016,53.884 34.2,53.7 34.822,53.7 35.522,53 38.7,53 40.2,51.5 40.2,46.52 40.6,46.12 41.053,46.12 41.098,46.164 41.35,46.164 41.53,46.344 v1(41.609,46.344)
Q224_RX1A_P: IC8A.AE4 J8A.11 | length 17.9
  Top Layer w0.1: IC8A.AE4@33.019,55.586 33.3,55.305 v1(33.3,55.2)
  Top Layer w0.145: v1(41.609,45.744) 41.612,45.747 43.132,45.747 J8A.11@43.135,45.75
  Mid-Layer 3 w0.1: v1(33.3,55.2) 33.377,55.123 33.557,55.123 33.68,55 33.68,54.569 33.776,54.473 33.776,53.785 34.101,53.46 34.723,53.46 35.423,52.76 38.601,52.76 39.96,51.401 39.96,46.421 40.501,45.88 41.152,45.88 41.197,45.924 41.35,45.924 41.53,45.744 v1(41.609,45.744)
Q224_RX1B_N: IC8B.AE3 J8B.9 | length 12.1
  Top Layer w0.145: v1(33.643,20.111) 33.643,20.086 34.019,19.71 IC8B.AE3@34.019,19.686 ; v1(41.4,16.3) 41.496,16.3 41.674,16.123 42.012,16.123 42.139,16.25 J8B.9@43.135,16.25
  Mid-Layer 3 w0.1: v1(33.643,20.111) 33.702,20.052 33.702,19.74 34.06,19.74 34.96,18.84 36.76,18.84 39.48,16.12 40.761,16.12 41.141,16.12 41.321,16.3 v1(41.4,16.3)
Q224_RX1B_P: IC8B.AE4 J8B.11 | length 12.1
  Top Layer w0.145: IC8B.AE4@33.019,19.686 33.019,19.666 33.405,19.281 v1(33.405,19.261) ; v1(41.4,15.7) 41.496,15.7 41.674,15.878 42.012,15.878 42.139,15.75 J8B.11@43.135,15.75
  Mid-Layer 3 w0.1: v1(33.405,19.261) 33.463,19.261 33.702,19.5 33.961,19.5 34.861,18.6 36.661,18.6 39.381,15.88 40.661,15.88 41.141,15.88 41.321,15.7 v1(41.4,15.7)
Q224_RX2A_N: IC8A.AD1 J8A.15 | length 15
  Top Layer w0.1: IC8A.AD1@36.019,54.586 35.678,54.586 35.619,54.527 35.619,54.444 35.864,54.2 36.883,54.2 37.5,53.583 37.5,52.6 38.1,52 38.1,51.5 38.8,50.8 38.8,50.1 39.7,49.2 39.7,48 40.7,47 40.7,45.8 41.5,45 41.5,44.809 41.709,44.6 41.991,44.6 42.05,44.659 42.05,44.66 42.139,44.75 J8A.15@43.135,44.75
Q224_RX2A_P: IC8A.AD2 J8A.17 | length 15.3
  Top Layer w0.1: IC8A.AD2@35.019,54.586 35.361,54.586 35.419,54.527 35.419,54.362 35.781,54 36.8,54 37.3,53.5 37.3,52.517 37.9,51.917 37.9,51.417 38.6,50.717 38.6,50.017 39.5,49.117 39.5,47.917 40.259,47.159 40.5,46.917 40.5,45.717 41.159,45.059 41.3,44.917 41.3,44.726 41.626,44.4 41.991,44.4 42.05,44.341 42.05,44.34 42.139,44.25 J8A.17@43.135,44.25
Q224_RX2B_N: IC8B.AD1 J8B.15 | length 9
  Top Layer w0.145: IC8B.AD1@36.019,18.686 36.078,18.627 36.078,18.418 36.167,18.328 36.285,18.328 36.296,18.318 37.029,18.318 40.724,14.623 42.012,14.623 42.139,14.75 J8B.15@43.135,14.75
Q224_RX2B_P: IC8B.AD2 J8B.17 | length 10
  Top Layer w0.145: IC8B.AD2@35.019,18.686 35.062,18.643 35.45,18.643 36.009,18.083 36.184,18.083 36.194,18.073 36.927,18.073 40.623,14.378 42.012,14.378 42.139,14.25 J8B.17@43.135,14.25
Q224_RX3A_N: IC8A.AB1 J8A.21 | length 14.6
  Top Layer w0.1: IC8A.AB1@36.019,52.586 35.678,52.586 35.619,52.527 35.619,52.444 35.861,52.203 36.754,52.203 36.871,52.086 37.263,51.694 37.263,50.79 37.973,50.079 38.09,49.962 38.09,49.31 38.823,48.577 38.823,47.777 39.952,46.648 39.952,45.653 40.722,44.883 40.722,43.697 41.319,43.1 41.991,43.1 42.05,43.159 42.05,43.161 42.139,43.25 J8A.21@43.135,43.25
Q224_RX3A_P: IC8A.AB2 J8A.23 | length 14.9
  Top Layer w0.1: IC8A.AB2@35.019,52.586 35.361,52.586 35.419,52.527 35.419,52.362 35.778,52.003 36.671,52.003 37.063,51.612 37.063,50.707 37.89,49.879 37.89,49.227 38.623,48.495 38.623,47.695 38.681,47.636 39.459,46.859 39.752,46.566 39.752,45.57 40.522,44.8 40.522,43.615 41.237,42.9 41.991,42.9 42.05,42.841 42.05,42.84 42.139,42.75 J8A.23@43.135,42.75
Q224_RX3B_N: IC8B.AB1 J8B.21 | length 8.7
  Top Layer w0.145: IC8B.AB1@36.019,16.686 36.019,16.603 36.126,16.497 36.126,16.457 36.211,16.372 37.475,16.372 40.724,13.123 42.012,13.123 42.139,13.25 J8B.21@43.135,13.25
Q224_RX3B_P: IC8B.AB2 J8B.23 | length 9.7
  Top Layer w0.145: IC8B.AB2@35.019,16.686 35.024,16.681 35.462,16.681 36.016,16.127 37.373,16.127 40.622,12.878 42.012,12.878 42.139,12.75 J8B.23@43.135,12.75
Q225_REFCLK0A_N: IC8A.V6 J8A.24 | length 23.6
  Top Layer w0.145: IC8A.V6@31.019,48.586 31.462,48.143 v1(31.473,48.143) ; v1(47.3,42.7) 47.3,42.766 47.411,42.878 47.512,42.878 47.742,42.878 47.87,42.75 J8A.24@48.865,42.75
  Mid-Layer 3 w0.1: v1(31.473,48.143) 31.463,48.143 31.106,48.5 31.106,48.641 31.165,48.7 31.6,48.7 32.4,47.9 32.4,44.761 33.201,43.96 38.04,43.96 38.87,43.13 39.12,42.88 47.041,42.88 47.221,42.7 v1(47.3,42.7)
Q225_REFCLK0A_P: IC8A.V7 J8A.22 | length 24
  Top Layer w0.145: IC8A.V7@30.019,48.586 v1(30.498,48.106) ; v1(47.3,43.3) 47.3,43.234 47.411,43.123 47.742,43.123 47.87,43.25 J8A.22@48.865,43.25
  Mid-Layer 3 w0.1: v1(30.498,48.106) 30.866,48.474 30.866,48.741 31.065,48.94 31.699,48.94 32.64,47.999 32.64,44.86 33.3,44.2 38.139,44.2 38.97,43.37 39.219,43.12 47.041,43.12 47.221,43.3 v1(47.3,43.3)
Q225_REFCLK0B_N: IC8B.V6 J8B.24 | length 19.9
  Top Layer w0.1: IC8B.V6@31.019,12.686 31.4,12.305 v1(31.4,12.3) ; v1(47.3,12.7) 47.3,12.8 47.4,12.9 47.721,12.9 47.78,12.841 47.78,12.84 47.87,12.75 J8B.24@48.865,12.75
  Mid-Layer 2 w0.1: v1(31.4,12.3) 31.02,12.68 31.02,12.99 31.079,13.049 32.051,13.049 32.557,12.543 44.046,12.543 44.384,12.88 47.041,12.88 47.221,12.7 v1(47.3,12.7)
Q225_REFCLK0B_P: IC8B.V7 J8B.22 | length 20.3
  Top Layer w0.1: v1(47.3,13.3) 47.3,13.2 47.4,13.1 47.721,13.1 47.78,13.159 47.78,13.161 47.87,13.25 J8B.22@48.865,13.25
  Top Layer w0.145: IC8B.V7@30.019,12.686 30.4,12.305 v1(30.4,12.3)
  Mid-Layer 2 w0.1: v1(30.4,12.3) 30.78,12.68 30.78,13.089 30.979,13.289 32.151,13.289 32.657,12.783 43.947,12.783 44.284,13.12 47.041,13.12 47.221,13.3 v1(47.3,13.3)
Q225_RX0A_N: IC8A.Y1 J8A.27 | length 14.6
  Top Layer w0.1: IC8A.Y1@36.019,50.586 35.678,50.586 35.619,50.527 35.619,50.444 35.883,50.181 36.825,50.181 36.942,50.063 37.232,49.773 37.232,48.968 38.004,48.196 38.004,47.338 39.117,46.226 39.117,45.337 39.869,44.585 39.869,42.331 40.6,41.6 41.991,41.6 42.05,41.659 42.05,41.661 42.139,41.75 J8A.27@43.135,41.75
Q225_RX0A_P: IC8A.Y2 J8A.29 | length 14.9
  Top Layer w0.1: IC8A.Y2@35.019,50.586 35.361,50.586 35.419,50.527 35.419,50.362 35.8,49.981 36.742,49.981 37.032,49.69 37.032,48.885 37.804,48.113 37.804,47.255 38.917,46.143 38.917,45.254 39.669,44.502 39.669,42.248 40.216,41.701 ; 40.217,41.7 40.517,41.4 41.991,41.4 42.05,41.341 42.05,41.34 42.139,41.25 J8A.29@43.135,41.25
Q225_RX0B_N: IC8B.Y1 J8B.27 | length 8.6
  Top Layer w0.145: IC8B.Y1@36.019,14.686 36.078,14.627 36.078,14.418 36.167,14.328 36.745,14.328 36.773,14.3 37.646,14.3 40.324,11.623 42.012,11.623 42.139,11.75 J8B.27@43.135,11.75
Q225_RX0B_P: IC8B.Y2 J8B.29 | length 9.5
  Top Layer w0.145: IC8B.Y2@35.019,14.686 35.062,14.643 35.45,14.643 36.009,14.083 36.643,14.083 36.672,14.055 37.545,14.055 40.222,11.378 42.012,11.378 42.139,11.25 J8B.29@43.135,11.25
Q225_RX1A_N: IC8A.V1 J8A.33 | length 14
  Top Layer w0.1: IC8A.V1@36.019,48.586 35.678,48.586 35.619,48.527 35.619,48.444 35.864,48.2 36.745,48.2 36.862,48.083 37.244,47.7 37.244,46.907 38.3,45.852 38.3,45 39.007,44.293 39.007,41.693 40.413,40.287 40.6,40.1 41.991,40.1 42.05,40.159 42.05,40.161 42.139,40.25 J8A.33@43.135,40.25
Q225_RX1A_P: IC8A.V2 J8A.35 | length 14.4
  Top Layer w0.1: IC8A.V2@35.019,48.586 35.361,48.586 35.419,48.527 35.419,48.362 35.781,48 36.662,48 37.044,47.618 37.044,46.825 38.1,45.769 38.1,44.917 38.659,44.359 38.807,44.21 38.807,41.61 38.866,41.551 40.328,40.089 ; 40.33,40.087 40.517,39.9 41.991,39.9 42.05,39.841 42.05,39.84 42.139,39.75 J8A.35@43.135,39.75
Q225_RX1B_N: IC8B.V1 J8B.33 | length 8.3
  Top Layer w0.145: IC8B.V1@36.019,12.686 36.019,12.62 36.239,12.4 37.946,12.4 40.224,10.123 42.012,10.123 42.139,10.25 J8B.33@43.135,10.25
Q225_RX1B_P: IC8B.V2 J8B.35 | length 9.3
  Top Layer w0.145: IC8B.V2@35.019,12.686 35.024,12.681 35.462,12.681 35.988,12.155 37.845,12.155 40.123,9.878 42.012,9.878 42.139,9.75 J8B.35@43.135,9.75
Q225_RX2A_N: IC8A.T1 J8A.39 | length 13.8
  Top Layer w0.1: IC8A.T1@36.019,46.586 35.678,46.586 35.619,46.527 35.619,46.444 35.863,46.2 36.825,46.2 37.265,45.76 37.265,44.818 38.111,43.972 38.111,40.689 39.946,38.854 40.2,38.6 41.991,38.6 42.05,38.659 42.05,38.66 42.139,38.75 J8A.39@43.135,38.75
Q225_RX2A_P: IC8A.T2 J8A.41 | length 14.1
  Top Layer w0.1: IC8A.T2@35.019,46.586 35.361,46.586 35.419,46.527 35.419,46.362 35.781,46 36.742,46 37.065,45.677 37.065,44.735 37.911,43.889 37.911,40.606 37.969,40.548 39.862,38.656 ; 39.863,38.654 40.117,38.4 41.991,38.4 42.05,38.341 42.05,38.34 42.139,38.25 J8A.41@43.135,38.25
Q225_RX2B_N: IC8B.T1 J8B.39 | length 8.1
  Top Layer w0.145: IC8B.T1@36.019,10.686 36.078,10.627 36.078,10.418 36.167,10.328 36.285,10.328 36.314,10.3 38.646,10.3 40.324,8.623 42.012,8.623 42.139,8.75 J8B.39@43.135,8.75
Q225_RX2B_P: IC8B.T2 J8B.41 | length 9.1
  Top Layer w0.145: IC8B.T2@35.019,10.686 35.062,10.643 35.45,10.643 36.009,10.083 36.184,10.083 36.212,10.055 38.545,10.055 40.223,8.378 42.012,8.378 42.139,8.25 J8B.41@43.135,8.25
Q225_RX3A_N: IC8A.P1 J8A.45 | length 13.3
  Top Layer w0.1: IC8A.P1@36.019,44.586 35.678,44.586 35.619,44.527 35.619,44.444 35.864,44.2 36.512,44.2 36.629,44.083 37.29,43.421 37.29,39.773 39.964,37.1 41.991,37.1 42.05,37.159 42.05,37.161 42.139,37.25 J8A.45@43.135,37.25
Q225_RX3A_P: IC8A.P2 J8A.47 | length 13.6
  Top Layer w0.1: IC8A.P2@35.019,44.586 35.361,44.586 35.419,44.527 35.419,44.362 35.781,44 36.429,44 37.09,43.339 37.09,39.691 39.881,36.9 41.991,36.9 42.05,36.841 42.05,36.84 42.139,36.75 J8A.47@43.135,36.75
Q225_RX3B_N: IC8B.P1 J8B.45 | length 7.9
  Top Layer w0.145: IC8B.P1@36.019,8.686 36.078,8.627 36.078,8.418 36.167,8.328 36.285,8.328 36.314,8.3 39.046,8.3 40.224,7.123 42.012,7.123 42.139,7.25 J8B.45@43.135,7.25
Q225_RX3B_P: IC8B.P2 J8B.47 | length 8.9
  Top Layer w0.145: IC8B.P2@35.019,8.686 35.062,8.643 35.45,8.643 36.009,8.083 36.184,8.083 36.212,8.055 38.945,8.055 40.123,6.878 42.012,6.878 42.139,6.75 J8B.47@43.135,6.75
Q226_REFCLK0A_N: IC8A.P6
Q226_REFCLK0A_P: IC8A.P7
Q226_REFCLK0B_N: IC8B.P6
Q226_REFCLK0B_P: IC8B.P7
Q226_RX0A_N: IC8A.M1
Q226_RX0A_P: IC8A.M2
Q226_RX0B_N: IC8B.M1
Q226_RX0B_P: IC8B.M2
Q226_RX1A_N: IC8A.K1
Q226_RX1A_P: IC8A.K2
Q226_RX1B_N: IC8B.K1
Q226_RX1B_P: IC8B.K2
Q226_RX2A_N: IC8A.H1
Q226_RX2A_P: IC8A.H2
Q226_RX2B_N: IC8B.H1
Q226_RX2B_P: IC8B.H2
Q226_RX3A_N: IC8A.F1
Q226_RX3A_P: IC8A.F2
Q226_RX3B_N: IC8B.F1
Q226_RX3B_P: IC8B.F2
S111: IC8A.F14 U1A.2 | length 53.3
  Top Layer w0.1: U1A.2@-11.25,55.846 -11.204,55.8 v1(-9.9,55.8)
  Top Layer w0.145: v2(22.489,37.086) IC8A.F14@22.989,36.586
  Mid-Layer 2 w0.1: v2(-0.1,33.5) 10.33,33.5 11.207,32.623 14.957,32.623 16.219,33.886 17.219,33.886 20.419,37.086 v2(22.489,37.086)
  Bottom Layer w0.1: v1(-9.9,55.8) -9.9,55.7 -8.695,54.495 -8.695,52.946 -8.381,52.632 -8.381,49.181 -4.4,45.2 -4.4,43.7 -0.058,39.358 -0.058,33.542 v2(-0.1,33.5)
S112: IC8B.F14 U1B.2 | length 49.5
  Top Layer w0.1: U1B.2@-11.25,26.1 -10.2,26.1 v1(-10,26.3)
  Top Layer w0.145: v2(22.414,1.186) IC8B.F14@22.914,0.686
  Mid-Layer 2 w0.1: v2(4.206,12.058) 4.942,12.058 5.2,11.8 8.41,11.8 19.024,1.186 v2(22.414,1.186)
  Bottom Layer w0.1: v1(-10,26.3) -10.6,25.7 -10.6,23.9 -8,21.3 -5.464,21.3 -4.864,20.7 -0.369,20.7 2.237,18.094 2.237,14.263 4.177,12.323 4.177,12.088 v2(4.206,12.058)
S211: IC8A.G14 U1A.6 | length 51.1
  Top Layer w0.1: U1A.6@-11.25,53.846 -11.15,53.946 -9.454,53.946 v1(-9.1,54.3)
  Top Layer w0.145: v2(22.424,38.086) IC8A.G14@22.924,37.586
  Mid-Layer 2 w0.1: v2(-0.408,34.239) 12.45,34.239 12.8,34.589 15.742,34.589 18.889,37.736 22.074,37.736 v2(22.424,38.086)
  Bottom Layer w0.1: v1(-9.1,54.3) -9.1,52.846 -8.758,52.504 -8.758,48.981 -4.803,45.026 -4.803,43.606 -0.408,39.211 v2(-0.408,34.239)
S212: IC8B.G14 U1B.6 | length 47
  Top Layer w0.1: U1B.6@-11.25,24.1 -11.15,24.2 -10.3,24.2 v1(-10,24.5)
  Top Layer w0.145: IC8B.G14@23.019,1.686 v2(23.519,2.186)
  Mid-Layer 2 w0.1: v2(4.699,12.529) 5.081,12.529 5.082,12.528 9.682,12.528 19.524,2.686 23.019,2.686 v2(23.519,2.186)
  Bottom Layer w0.1: v1(-10,24.5) -7.7,22.2 -5.6,22.2 -4.3,20.9 0,20.9 2.5,18.4 2.5,14.729 v2(4.699,12.529)
S311: IC8A.H14 U1A.15 | length 47.5
  Top Layer w0.1: U1A.15@-11.25,49.346 -11.15,49.246 -9.546,49.246 v1(-9.2,48.9)
  Top Layer w0.145: IC8A.H14@23.019,38.586 v2(23.519,38.086)
  Mid-Layer 2 w0.1: v2(-0.887,33.889) 15.445,33.889 19.042,37.486 22.919,37.486 v2(23.519,38.086)
  Bottom Layer w0.1: v1(-9.2,48.9) -5.161,44.861 -5.161,43.417 -0.887,39.143 v2(-0.887,33.889)
S312: IC8B.H14 U1B.15 | length 47.8
  Top Layer w0.1: U1B.15@-11.25,19.6 -10.1,19.6 v1(-9.9,19.4)
  Top Layer w0.145: v2(22.519,2.186) IC8B.H14@23.019,2.686
  Mid-Layer 2 w0.1: v2(5.642,12.158) 9.042,12.158 19.365,1.836 22.169,1.836 v2(22.519,2.186)
  Mid-Layer 3 w0.1: v1(-9.9,19.4) -9.2,19.4 -8.1,20.5 -2.891,20.5 -1.891,21.5 v2(3.2,21.5)
  Bottom Layer w0.1: v2(3.2,21.5) 3.2,15.4 5.642,12.958 v2(5.642,12.158)
S411: IC8A.J14 U1A.19 | length 48
  Top Layer w0.1: U1A.19@-11.25,47.346 -11.15,47.446 -9.454,47.446 -9,47.9 v1(-9,48)
  Top Layer w0.145: IC8A.J14@23.019,39.586 v2(23.519,40.086)
  Mid-Layer 2 w0.1: v2(-1.391,34.092) -0.747,34.736 12.664,34.736 12.717,34.789 15.02,34.789 18.898,38.667 22.595,38.667 23.183,39.255 23.183,39.75 v2(23.519,40.086)
  Bottom Layer w0.1: v1(-9,48) -6.1,45.1 -6.1,43.809 -1.391,39.099 v2(-1.391,34.092)
S412: IC8B.J14 U1B.19 | length 44.7
  Top Layer w0.1: U1B.19@-11.25,17.6 v1(-9.4,17.6)
  Top Layer w0.145: v2(22.494,3.186) IC8B.J14@22.994,3.686
  Mid-Layer 2 w0.1: v2(5.227,12.878) 5.251,12.902 10.308,12.902 19.517,3.693 21.988,3.693 v2(22.494,3.186)
  Mid-Layer 3 w0.1: v1(-9.4,17.6) -3.8,17.6 -1.7,19.7 v2(2.7,19.7)
  Bottom Layer w0.1: v2(2.7,19.7) 2.7,15.453 5.227,12.926 v2(5.227,12.878)
SPI_SCLK_BUF: DA22A.10 DA22B.10 R163.2 | length 216.4
  Top Layer w0.15: v2(62.074,-8.934) 62.074,-7.659 63.245,-6.488 75.375,-6.488 76.487,-5.377 88.982,-5.377 92.956,-9.351 94.377,-9.351 R163.2@94.416,-9.389
  Mid-Layer 2 w0.1: v1(-58.2,-4.3) -54.591,-4.3 -50.696,-8.196 34.761,-8.196 38.88,-12.314 58.694,-12.314 v2(62.074,-8.934)
  Mid-Layer 3 w0.1: v1(-58.6,45.4) -58.609,45.391 -58.609,45.309 -58.5,45.2 -58.5,37.5 -56.7,35.7 -56.7,29.1 -58.5,27.3 v1(-58.5,15.2) -58.2,14.9 -58.2,7.6 -56.596,5.996 -56.596,2.704 -58.2,1.1 v1(-58.2,-4.3)
  Bottom Layer w0.1: v1(-58.6,45.4) -58.6,45.508 -58.5,45.608 -58.5,46.375 DA22A.10@-58.325,46.55 ; v1(-58.5,15.2) -58.5,16.175 DA22B.10@-58.325,16.35
Tempsens_CS: DD5.2 R102.1 | length 173.3
  Top Layer w0.2: DD5.2@119.319,-3.214 v2(119.319,-1.414)
  Mid-Layer 3 w0.15: v2(-43.581,-14.414) -27.056,-14.414 -26.4,-15.071 -2.755,-15.071 -1.889,-14.204 8.83,-14.204 10.219,-15.593 65.153,-15.593 65.433,-15.872 70.316,-15.872 71.35,-14.838 77.643,-14.838 78.398,-15.593 86.005,-15.593 86.564,-15.034 88.798,-15.034 95.218,-8.614 102.119,-8.614 109.319,-1.414 v2(119.319,-1.414)
  Bottom Layer w0.15: v2(-43.581,-14.414) -43.513,-14.414 -43.413,-14.514 R102.1@-42.921,-14.514
Tempsens_DIN: DD5.1 R99.1 | length 172.2
  Top Layer w0.2: DD5.1@120.119,-3.214 v2(120.119,-1.914)
  Mid-Layer 3 w0.15: v2(-43.681,-15.714) -28.313,-15.714 -27.655,-16.372 75.861,-16.372 76.015,-16.218 88.25,-16.218 90.526,-13.943 90.526,-13.906 94.585,-9.846 102.002,-9.846 109.934,-1.914 v2(120.119,-1.914)
  Bottom Layer w0.15: v2(-43.681,-15.714) -43.613,-15.714 -43.513,-15.814 R99.1@-42.921,-15.814
Tempsens_DOUT: DD5.64 R100.1 | length 174.3
  Top Layer w0.2: DD5.64@121.819,-4.914 v2(121.819,-3.114)
  Mid-Layer 3 w0.15: v2(-43.581,-17.014) -43.546,-17.049 -38.116,-17.049 -37.581,-16.514 -30.181,-16.514 -29.443,-17.253 77.537,-17.253 77.566,-17.223 87.833,-17.223 87.862,-17.253 89.231,-17.253 96.196,-10.287 102.435,-10.287 109.608,-3.114 v2(121.819,-3.114)
  Bottom Layer w0.15: v2(-43.581,-17.014) R100.1@-42.921,-17.014
Tempsens_SCLK: DD5.63 R101.1 | length 177.1
  Top Layer w0.2: DD5.63@121.819,-5.714 122.819,-5.714 123.419,-5.114 v2(123.419,-4.214)
  Mid-Layer 3 w0.15: v2(-43.481,-18.314) -43.476,-18.319 -36.886,-18.319 -36.481,-17.914 -17.031,-17.914 -16.731,-17.614 76.219,-17.614 77.164,-18.559 90.774,-18.559 98.519,-10.814 100.825,-10.814 101.133,-11.122 104.023,-11.122 110.931,-4.214 v2(123.419,-4.214)
  Bottom Layer w0.15: v2(-43.481,-18.314) R101.1@-42.921,-18.314
V_PROTA_P: C319B.2 C320B.2 D8A.2 D8B.2 D9A.2 D9B.2 D10A.2 D10B.2 D11A.2 D11B.2 R245B.2 R246B.2 | length 109.8
  Top Layer w0.3: v1(-80.51,4.375) -80.51,4.321 -80.375,4.186 -80.375,3.975 -80.25,3.85 D11A.2@-80.1,3.85 ; v1(-80.4,19) -80.4,18.946 -80.275,18.821 -80.275,18.575 -80.15,18.45 D11B.2@-80,18.45 ; v1(-80.4,26.4) -80.4,26.346 -80.275,26.221 -80.275,25.975 -80.15,25.85 D9B.2@-80,25.85 ; D9A.2@-80.1,10.85 v1(-80.1,11.5) ; v1(-68,4.2) -67.4,3.6 -67.4,0.975 -67.275,0.85 D10A.2@-67.15,0.85 ; v1(-67.1,18.9) -67.062,18.862 -67.062,16.34 D10B.2@-67,16.279 ; v1(-67.1,26.2) -67.1,26.146 -66.765,25.811 -66.765,23.804 -66.89,23.679 D8B.2@-67,23.679
  Top Layer w0.5: D8A.2@-67.25,8.675 -67.225,8.675 -67.2,8.7 v1(-67.2,11)
  Layer 1 w0.5: v1(-80.51,4.375) -80.176,4.041 -75.849,4.041 -75.208,3.4 -70.53,3.4 -69.73,4.2 -61.4,4.2 v1(-61,3.8) ; v1(-80.4,19) -75.282,19 -74.405,18.124 -70.176,18.124 -69.4,18.9 v1(-67.1,18.9) ; v1(-80.4,26.4) -80.1,26.1 -73.7,26.1 -73.13,25.53 -70.17,25.53 -69.5,26.2 v1(-67.1,26.2) ; v1(-80.1,11.5) -73.9,11.5 -73.1,12.3 -72.2,12.3 -71.8,11.9 -70.5,11.9 -70.1,11.5 -67.7,11.5 v1(-67.2,11)
  Layer 2 w0.5: v1(-68,4.2) -67.2,5 v1(-67.2,11) -67.2,13.5 -67.1,13.6 v1(-67.1,18.9) -67.1,23.8 -66.6,24.3 -66.6,25.7 v1(-67.1,26.2)
  Bottom Layer w0.3: v1(-61,3.8) -61,2.5 -61.3,2.2 -61.3,0.2 R246B.2@-61.2,0.1 -61.1,0 C320B.2@-61.1,-1.5 R245B.2@-57.8,-1.5 C319B.2@-56.4,-1.5
V_PROTC_P: C319A.2 C320A.2 D8C.2 D8D.2 D9C.2 D9D.2 D10C.2 D10D.2 D11C.2 D11D.2 R245A.2 R246A.2 | length 107.4
  Top Layer w0.3: v1(-80.568,56.368) -80.568,56.314 -80.443,56.189 -80.443,55.943 -80.318,55.818 D9D.2@-80.168,55.818 ; v1(-80.4,41.9) -80.4,41.846 -80.275,41.721 -80.275,41.475 -80.15,41.35 D9C.2@-80,41.35 ; v1(-80.4,49.2) -80.4,49.146 -80.275,49.021 -80.275,48.775 -80.15,48.65 D11D.2@-80,48.65 ; v1(-80.333,34.519) -80.333,34.483 D11C.2@-79.9,34.05 ; v1(-67.7,34.6) -67.662,34.562 -67.362,34.562 -66.975,34.175 -66.975,31.975 D10C.2@-66.95,31.95 ; v1(-67.3,56.2) -67.262,56.162 -67.262,53.74 D8D.2@-67.168,53.646 ; v1(-67.2,41.8) -67.162,41.762 -67.162,39.304 -67.037,39.179 D8C.2@-67,39.179 ; v1(-67.2,48.5) -67.162,48.462 -67.162,46.604 -67.037,46.479 D10D.2@-67,46.479
  Layer 1 w0.5: v1(-80.568,56.368) -73.832,56.368 -73,57.2 -72.211,57.2 -71.856,56.844 -67.944,56.844 v1(-67.3,56.2) ; v1(-80.4,41.9) -73.6,41.9 -72.688,40.988 -70.712,40.988 -69.9,41.8 v1(-67.2,41.8) ; v1(-80.4,49.2) -77.3,49.2 -76.94,48.84 -74.534,48.84 -73.474,49.9 -71.7,49.9 -71.3,49.5 -68.543,49.5 -67.543,48.5 v1(-67.2,48.5) ; v1(-80.333,34.519) -79.894,34.079 -77.313,34.079 -76.823,33.589 -70.511,33.589 -69.5,34.6 v1(-67.7,34.6) -66.8,34.6 -64.5,32.3 v1(-61.8,32.3)
  Layer 2 w0.5: v1(-67.7,34.6) -67.2,35.1 v1(-67.2,41.8) -67.119,41.881 -67.119,47.949 -67.2,48.03 v1(-67.2,48.5) -67.3,48.6 v1(-67.3,56.2)
  Bottom Layer w0.3: v1(-61.8,32.3) -61.1,31.6 -61.1,30.4 R246A.2@-61.3,30.2 -61.2,30.1 -61.2,28.575 -60.725,28.1 -58.982,28.1 -58.782,28.3 -58.2,28.3 R245A.2@-57.9,28.6 C320A.2@-56.5,28.6
VIN_P5V0: B6.1 C122.2 DA7.19 JP1.1 VD4.2 | length 5.9
  Top Layer w0.2: v1(-77.747,-13.232) -77.747,-12.252 VD4.2@-77.694,-12.2 ; v1(4.754,-29.599) DA7.19@6.004,-29.599 DA7.19@6.154,-29.599 ; v1(90.019,-41.314) B6.1@90.919,-41.314 v1(91.819,-41.314)
  Bottom Layer w0.2: C122.2@3.154,-29.599 v1(4.754,-29.599)
VIN_P12V0: B11.1 C4.2 C118.2 C135.2 C136.1 C137.2 DA7.6 DA7.7 DA8.6 DA8.7 | length 1.8
  Top Layer w0.2: v1(90.019,-32.614) B11.1@90.919,-32.614 v1(91.819,-32.614)
  other v3: 55.599,-30.552 57.209,-30.542 17.037,-30.462 15.857,-30.442
VREF_1.024V1: IC1A.1 IC1A.2 R400C.2 R400D.2 | length 49.7
  Top Layer w0.3: v1(-85.9,34.9) R400C.2@-85.04,34.9 ; v1(-85.6,51.5) -85.4,51.7 -84.84,51.7 R400D.2@-84.64,51.9 ; IC1A.2@-61.9,34.95 -61.9,34.1 -61.724,33.924 -61.476,33.924 -61.3,34.1 -61.3,34.9 IC1A.1@-61.25,34.95 -61.3,35 v1(-61.3,36.3)
  Layer 1 w0.5: v1(-85.9,34.9) -83.8,34.9 -82.5,36.2 -77.733,36.2 -76.533,35 -73.1,35 -71.5,36.6 -66.8,36.6 -66.2,37.2 -62.2,37.2 v1(-61.3,36.3)
  Layer 2 w0.5: v1(-85.9,34.9) -85.9,38.7 -85.4,39.2 -85.4,48 -85.34,48.06 -85.34,49.65 -85.6,49.91 v1(-85.6,51.5)
VREF_1.024V2: IC1B.1 IC1B.2 R400A.2 R400B.2 | length 36.8
  Top Layer w0.3: v1(-62.1,6.2) -61.879,5.979 -61.879,5.012 IC1B.2@-61.804,4.937 -61.804,4.437 -61.729,4.362 -61.229,4.362 -61.154,4.437 IC1B.1@-61.154,4.937
  Top Layer w0.5: R400A.2@-88.04,8.1 -87.94,8.2 -87.94,8.76 v1(-87.9,8.8) -87.9,10.97 -87.64,11.23 -87.64,13.4 R400B.2@-87.54,13.5
  Layer 1 w0.5: v1(-87.9,8.8) -80.8,8.8 -79.9,7.9 -77.7,7.9 -77.1,8.5 -76.3,8.5 -75.1,7.3 -72.9,7.3 -71.9,6.3 -67,6.3 -66.124,7.176 -63.076,7.176 v1(-62.1,6.2)
VREF_1.024V_DIVA: DA1A.3 DA1A.10 IC1A.3 IC1A.10 IC1A.12 R42A.1 R44A.2 | length 31.2
  Top Layer w0.2: IC1A.10@-63.85,29.05 -63.85,32.933 -63.64,33.143 v1(-63.623,33.143) ; v1@-63.631,33.151 -63.604,33.179 v1@-63.604,33.189 ; v1@-63.6,33.189 -63.6,33.2 -62.667,33.2 -62.55,33.317 ; IC1A.12@-62.55,29.05 -62.433,29.167 -62.433,33.2 ; IC1A.3@-62.55,34.95 -62.55,33.317 ; v1(-51.5,33.7) -58.527,33.7 -59.127,33.1 v1(-60.4,33.1) -60.457,33.157 -60.625,33.157 -60.667,33.2 -62.433,33.2 ; -62.55,33.317 -62.433,33.2
  Bottom Layer w0.2: DA1A.10@-64.819,33.174 -64.804,33.158 -63.638,33.158 v1(-63.623,33.143) ; v1(-60.4,33.1) -60.4,33.8 -60.417,33.817 -60.417,33.983 -59.926,34.474 DA1A.3@-58.919,34.474 ; R44A.2@-52.4,38 -52.4,35.975 -52.025,35.6 -51.8,35.6 -51.5,35.3 v1(-51.5,33.7)
VREF_1.024V_DIVB: DA1B.3 DA1B.10 IC1B.3 IC1B.10 IC1B.12 R42B.1 R44B.2 | length 31
  Top Layer w0.2: IC1B.10@-63.754,-0.963 -63.754,2.446 v1(-63.3,2.9) -62.4,2.9 ; IC1B.12@-62.454,-0.963 -62.4,-0.908 -62.4,2.9 ; IC1B.3@-62.454,4.937 -62.454,2.954 -62.4,2.9 ; v1(-60.301,2.801) -60.853,2.801 -60.951,2.9 -62.4,2.9 ; v1@-60.301,2.9 -59.3,2.9 -58.7,3.5 -52.067,3.5 -51.867,3.7 v1(-51.8,3.7)
  Bottom Layer w0.2: DA1B.10@-64.713,3.106 -63.506,3.106 v1(-63.3,2.9) ; v1(-60.301,2.801) -60.301,3.353 -60.4,3.451 -60.4,3.9 -59.894,4.406 DA1B.3@-58.813,4.406 ; R44B.2@-52.8,7.9 R42B.1@-52.8,6.1 -52.8,5.875 -52.425,5.5 -52.2,5.5 -51.8,5.1 v1(-51.8,3.7)
VREF_1.024VA: C103B.1 DA17B.6 DA22B.3 R39B.1 R300A.2 R300B.2 | length 62.8
  Top Layer w0.2: DA17B.6@-51.2,-0.035 -50.235,-0.035 -49.9,0.3 v1(-49.9,1.5)
  Top Layer w0.5: R300A.2@-88.04,6.2 -89.2,7.36 v1(-89.2,9.599) -89.2,14.3 -88.3,15.2 -87.64,15.2 R300B.2@-87.54,15.3
  Layer 1 w0.5: v1(-89.2,9.599) -89.199,9.6 -74.9,9.6 -73.5,8.2 -65.9,8.2 -64.7,9.4 -63.1,9.4 -60.6,6.9 -55.4,6.9 v1(-53.9,5.4)
  Bottom Layer w0.2: DA22B.3@-55.732,10.443 -55.656,10.368 -55.656,9.519 -55.229,9.092 -54.292,9.092 -53.9,8.7 v1(-53.9,5.4) -53.4,4.9 -53.175,4.9 -52.8,4.525 R39B.1@-52.8,4.3 C103B.1@-52.8,3.05 ; C103B.1@-51.8,2.25 -51.05,1.5 v1(-49.9,1.5)
VREF_1.024VC: C103A.1 DA17A.6 DA22A.3 R39A.1 R300C.2 R300D.2 | length 66.3
  Top Layer w0.2: DA17A.6@-51.215,29.801 -50.199,29.801 -49.9,30.1 v1(-49.9,31.7)
  Top Layer w0.4: v1(-84.6,56.95) -84.6,56.26 R300D.2@-84.54,56.2 ; R300C.2@-83.8,40.34 -83.126,41.014 -83.126,41.074 v1(-83.107,41.093)
  Layer 1 w0.5: v1(-83.107,41.093) -81.793,41.093 -79.012,38.312 -77.688,38.312 -77,39 -76.13,39 -75.93,38.8 -62.3,38.8 -61.6,38.1 -56.1,38.1 v1(-53.6,35.6)
  Layer 2 w0.5: v1(-84.6,56.95) -84.6,54.3 -83.8,53.5 -83.8,51.1 -82.7,50 -82.7,47.8 -83.107,47.393 v1(-83.107,41.093)
  Bottom Layer w0.2: DA22A.3@-55.725,40.65 -55.638,40.563 -55.638,39.738 -53.6,37.7 v1(-53.6,35.6) -53,35 -52.775,35 -52.4,34.625 R39A.1@-52.4,34.4 -52.4,32.85 C103A.1@-51.8,32.25 -51.25,31.7 v1(-49.9,31.7)
XINBAA_N: J12A.1 R128A.1 | length 1.5
  Top Layer w0.145: J12A.1@-53.9,50.932 -53.9,50.957 -53.472,51.384 -53.448,51.384 -53.189,51.643 -53.017,51.643 -52.8,51.861 R128A.1@-52.8,51.872
XINBAA_P: J10A.1 R126A.1 | length 1.5
  Top Layer w0.1: J10A.1@-53.9,53.775 -53.9,53.75 -53.45,53.3 -53.425,53.3 -53.169,53.044 -53.04,53.044 -52.8,52.804 R126A.1@-52.8,52.8
XINBAB_N: J12B.1 R128B.1 | length 1.7
  Top Layer w0.145: J12B.1@-54.1,20.525 -54.1,20.55 -53.673,20.977 -53.514,20.977 -53.126,21.365 -53.106,21.365 -52.889,21.583 R128B.1@-52.889,21.603